# Altium PCB PCB1.PcbDoc
Units mm, origin at the board's own origin, x right, y up, seen from the top; angles counter-clockwise.
Board outline 50.25 x 80.25 mm, 2 copper layers (Top Layer, Bottom Layer); 28 components, 24 nets, 97 pads, 80 vias.
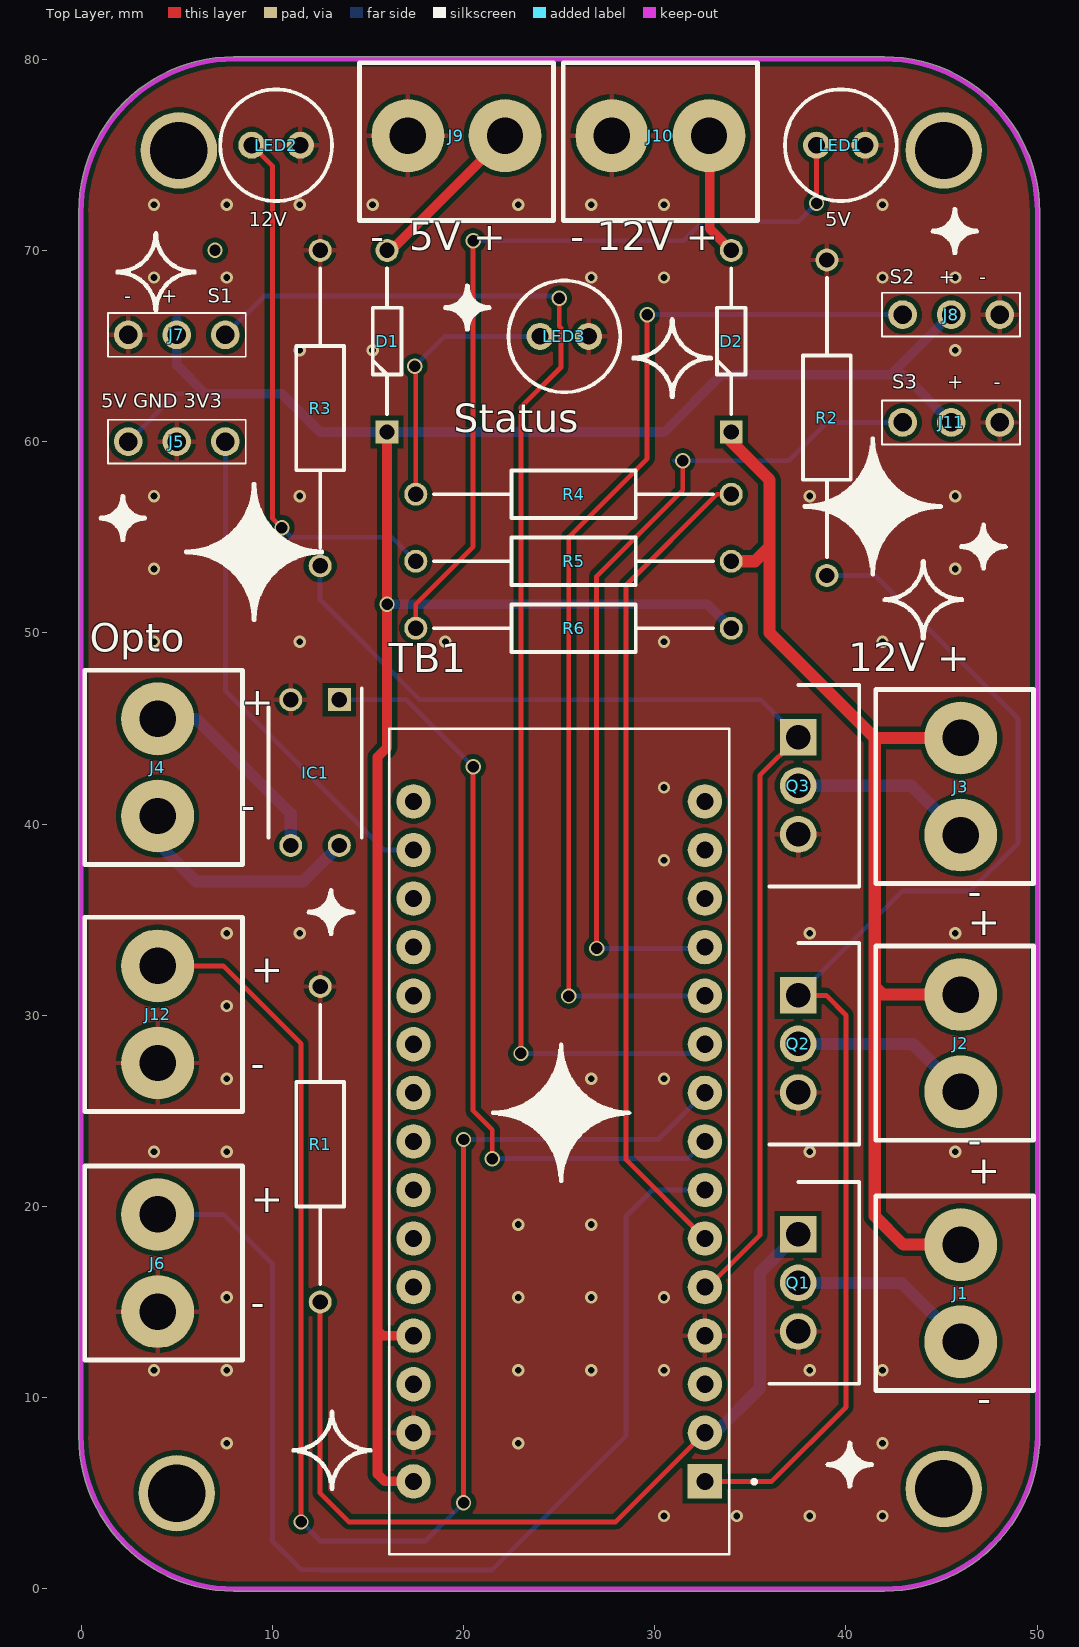
[diagram p0: Top Layer view]
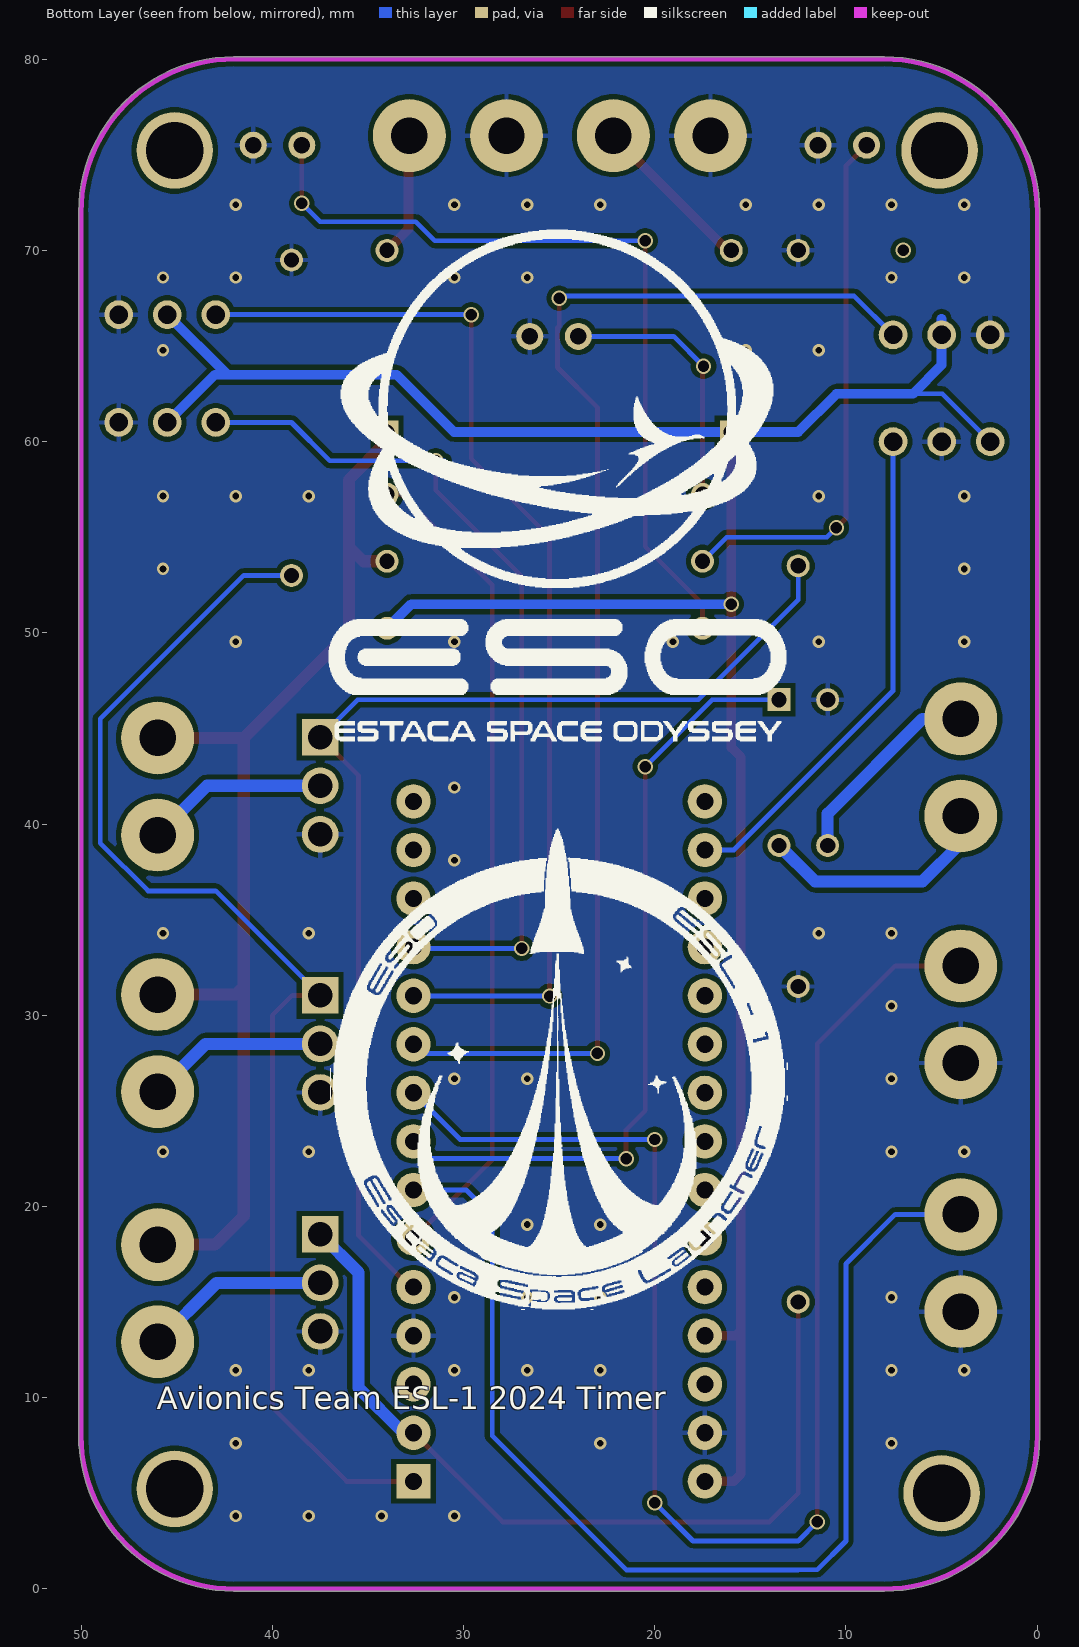
[diagram p1: Bottom Layer view, seen from below]
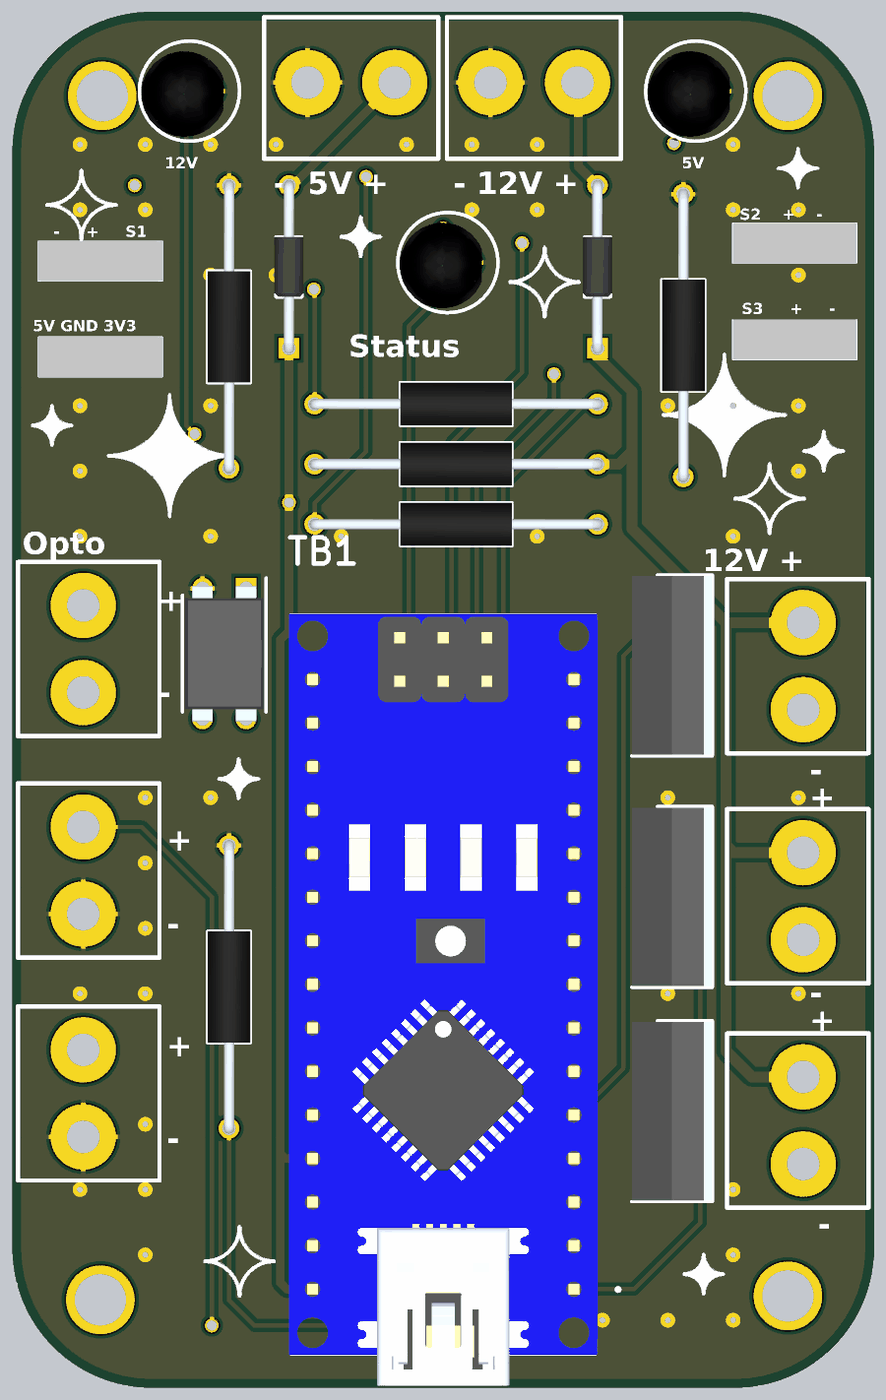
[diagram p2: 3D render of the assembled board from above, using the file's embedded part models]

## Layer stack, top to bottom
Top Solder: solder mask 0.0102, Solder Resist, Dk 3.5
Top Layer: signal copper 0.0356
Dielectric 1: dielectric 0.32, FR-4, Dk 4.8
Bottom Layer: signal copper 0.0356
Bottom Solder: solder mask 0.0102, Solder Resist, Dk 3.5

## Board outline
8,-0.127 cw(c8,8) -0.127,8 -0.127,72 cw(c8,72) 8,80.127 42,80.127 cw(c42,72) 50.127,72 50.127,7.5 50.107,7.432 cw(c42,8) 42,-0.127

## Design rules (kind name [scope] priority, off if disabled: settings)
Clearance [All] p1: gap=0.254 ignorepadtopadclearanceinfootprint=FALSE except(0: Arc-Hole Track-Hole SMDPad-Hole THPad-Hole Via-Hole Fill-Hole Poly-Hole Region-Hole Text-Hole)
PolygonConnect [All] p1: connectstyle=Relief reliefconductorwidth=0.254 reliefentries=4 polygonreliefangle="90 Angle" airgapwidth=0.254
RoutingVias [All] p1: holewidth=0.711 width=1.27 viastyle="Through Hole" minholewidth=0.5 minwidth=0.8 maxholewidth=0.6 maxwidth=0.9
SolderMaskExpansion [All] p1: expansion=0.102 istentingtop=FALSE
Width [All] p1: maxlimit=1.2 minlimit=0.254 preferedwidth=0.254 minimp=50.000000 maximp=50.000000 favimp=50.000000
30 further rules are at their usual default settings.

## Components (designator, comment, footprint, x,y, rotation, side; value= is the part's Value field where it differs from the comment)
D1 "SD103A-TR" DIOAD950W60L350D150 16,60.5 r90 top
D2 "SD103A-TR" DIOAD950W60L350D150 34,60.5 r90 top
IC1 "PC817X2NSZ0F" DIP762W60P254L458H400Q4N 12.23,42.69 r270 top
J1 "2 PIN" "Header 2_PIN" 46,12.92 r90 top
J2 "2 PIN" "Header 2_PIN" 46,26 r90 top
J3 "2 PIN" "Header 2_PIN" 46,39.42 r90 top
J4 "2 PIN" "Header 2_PIN" 4,45.5 r270 top
J5 "87224-3" 872243 2.46,60 r0 top
J6 "2 PIN" "Header 2_PIN" 4,19.58 r270 top
J7 "87224-3" 872243 2.46,65.58 r0 top
J8 "87224-3" 872243 48.04,66.64 r180 top
J9 "2 PIN" "Header 2_PIN" 22.167,76 r180 top
J10 "2 PIN" "Header 2_PIN" 32.836,76 r180 top
J11 "87224-3" 872243 48.04,61 r180 top
J12 "2 PIN" "Header 2_PIN" 4,32.58 r270 top
LED1 "HLMP-4740" HLMP4740 38.46,75.5 r90 top
LED2 "HLMP-4740" HLMP4740 8.923,75.5 r90 top
LED3 "HLMP-4740" HLMP4740 24,65.5 r90 top
Q1 "IRLZ44NPBF" TO254P469X1042X1967-3P 37.5,18.54 r270 top
Q2 "IRLZ44NPBF" TO254P469X1042X1967-3P 37.5,31.04 r270 top
Q3 "IRLZ44NPBF" TO254P469X1042X1967-3P 37.5,44.54 r270 top
R1 "MRS25000C1001FC100" RESAD1650W60L650D250 12.5,31.5 r270 top
R2 "MRS25000C1001FC100" RESAD1650W60L650D250 39,69.5 r270 top
R3 "MRS25000C1001FC100" RESAD1650W60L650D250 12.5,70 r270 top
R4 "MRS25000C1001FC100" RESAD1650W60L650D250 34,57.246 r180 top
R5 "MRS25000C1001FC100" RESAD1650W60L650D250 34,53.741 r180 top
R6 "MRS25000C1001FC100" RESAD1650W60L650D250 34,50.237 r180 top
TB1 "ARDUINO_NANO" SHIELD_ARDUINO_NANO 25,23.4 r180 top locked

## Footprints (in the part's own frame and the unit in brackets; to place one, negate y for a bottom-side part, rotate by r counter-clockwise, add the part's x,y. Pads: shape width x height; smd on the part's side, far side on the other; paste and mask are expansions set on the pad)
872243 [mil]
  round 59.09 hole 38: 1(0,0) 2(100,0) 3(200,0)
  silkscreen extent -42,-45 242,45, body extent -42,-46 242,46, height 409
DIOAD950W60L350D150 [mm]
  rect 1.2x1.2 hole 0.8: 1(0,0)
  round 1.2 hole 0.8: 2(9.5,0)
  silkscreen extent 0.95,-0.75 8.55,0.75, body extent -0.3,-0.85 9.8,0.85, height 1.69
DIP762W60P254L458H400Q4N [mm]
  rect 1.2x1.2 hole 0.8: 1(-3.81,1.27)
  round 1.2 hole 0.8: 2(-3.81,-1.27) 3(3.81,-1.27) 4(3.81,1.27)
  silkscreen extent -4.41,-2.44 3.4,2.44, body extent -3.96,-2.29 3.96,2.29, height 4
"Header 2_PIN" [mm] "200 mils"
  round 3.81 hole 1.905: 1(0,0) 2(5.08,0)
  silkscreen extent -2.54,-3.81 7.62,4.45, body extent -2.46,-3.56 7.54,4.44, height 10.03
HLMP4740 [mm]
  round 1.414 hole 0.87: 1(0,0) 2(0,-2.54)
  silkscreen extent -2.92,-4.19 2.92,1.65, body extent -2.99,-3.26 2.66,1.89, height 7.93
RESAD1650W60L650D250 [mm]
  round 1.2 hole 0.8: 1(0,0) 2(16.5,0)
  silkscreen extent 0.95,-1.25 15.55,1.25, body extent -0.3,-1.25 16.8,1.25, height 2.49
SHIELD_ARDUINO_NANO [mm]
  rect 1.8x1.8 / inner round 1.8 / far side rect 1.8x1.8 hole 0.9: 1(-7.62,17.78)
  round 1.8 hole 0.9: 2(-7.62,15.24) 3(-7.62,12.7) 4(-7.62,10.16) 5(-7.62,7.62) 6(-7.62,5.08) 7(-7.62,2.54) 8(-7.62,0) 9(-7.62,-2.54) 10(-7.62,-5.08) 11(-7.62,-7.62) 12(-7.62,-10.16) 13(-7.62,-12.7) 14(-7.62,-15.24) 15(-7.62,-17.78) 16(7.62,-17.78) 17(7.62,-15.24) 18(7.62,-12.7) 19(7.62,-10.16) 20(7.62,-7.62) 21(7.62,-5.08) 22(7.62,-2.54) 23(7.62,0) 24(7.62,2.54) 25(7.62,5.08) 26(7.62,7.62) 27(7.62,10.16) 28(7.62,12.7) 29(7.62,15.24) 30(7.62,17.78)
  silkscreen extent -10.3,-21.59 8.89,21.59, body extent -9,-21.6 9,23.4, height 12.6
TO254P469X1042X1967-3P [mm]
  rect 1.92x1.92 hole 1.28: 1(0,0)
  round 1.92 hole 1.28: 2(2.54,0) 3(5.08,0)
  silkscreen extent -2.73,-1.5 7.81,3.19, body extent -2.67,-1.5 7.75,3.19, height 18.84

## Part data
D1 D2: "Schottky Diode", Manufacturer_Name=Vishay, Mouser Part Number=625-SD103A, Arrow Part Number=SD103A-TR, Arrow Price/Stock=https://www.arrow.com/en/products/sd103a-tr/vishay?region=nac, Datasheet Link=https://componentsearchengine.com/Datasheets/5/SD103A-TR.pdf, Manufacturer_Part_Number=SD103A-TR, Mouser Price/Stock=https://www.mouser.co.uk/ProductDetail/Vishay-Semiconductors/SD103A-TR?qs=RwahMLkpD2urFD%2FzZdGOBw%3D%3D
IC1: "Integrated Circuit", Manufacturer_Name="Sharp Microelectronics", Mouser Part Number=N/A, Datasheet Link=https://datasheet.datasheetarchive.com/originals/distributors/Datasheets_SAMA/458e45842a103a05998fcebbd6f7366e.pdf, Height=4mm, Manufacturer_Part_Number=PC817X2NSZ0F, Mouser Price/Stock=https://www.mouser.co.uk/ProductDetail/Sharp-Microelectronics/PC817X2NSZ0F?qs=6kT3pPPHxnU7uYWM8Yy85A%3D%3D
J1 J2 J3 J4 J6 J9 J10 J12: library part Connector_2Pin
J5 J7 J8 J11: "Connector", Manufacturer_Name="TE Connectivity", Mouser Part Number=571-872243, Arrow Part Number=87224-3, Arrow Price/Stock=https://www.arrow.com/en/products/87224-3/te-connectivity?region=nac, Datasheet Link=https://datasheet.datasheetarchive.com/originals/distributors/Datasheets_SAMA/3b9b08c08f06dc562fe3ba32b60fa864.pdf, Height=10.3632mm, Manufacturer_Part_Number=87224-3, Mouser Price/Stock=https://www.mouser.co.uk/ProductDetail/TE-Connectivity/87224-3?qs=VKrXD49J9ErediZOfWku7Q%3D%3D
LED1 LED2 LED3: "LED", Manufacturer_Name="Avago Technologies", Mouser Part Number=630-HLMP-4740, Datasheet Link=https://docs.broadcom.com/docs/AV02-1557EN, Height=9.19mm, Manufacturer_Part_Number=HLMP-4740, Mouser Price/Stock=https://www.mouser.co.uk/ProductDetail/Broadcom-Avago/HLMP-4740?qs=jT9z6tsiFNlbkh2eYMYS%2Fw%3D%3D
Q1 Q2 Q3: "MOSFET (N-Channel)", Manufacturer_Name=Infineon, Mouser Part Number=942-IRLZ44NPBF, Arrow Part Number=IRLZ44NPBF, Arrow Price/Stock=https://www.arrow.com/en/products/irlz44npbf/infineon-technologies-ag?region=nac, Datasheet Link=http://www.irf.com/product-info/datasheets/data/irlz44n.pdf, Height=4.69mm, Manufacturer_Part_Number=IRLZ44NPBF, Mouser Price/Stock=https://www.mouser.co.uk/ProductDetail/Infineon-Technologies/IRLZ44NPBF?qs=9%252BKlkBgLFf15OZZk%252BD0ibg%3D%3D
R1 R2 R3 R4 R5 R6: "Resistor", Manufacturer_Name=Vishay, Mouser Part Number=594-MRS25000C1001FC1, Arrow Part Number=MRS25000C1001FC100, Arrow Price/Stock=https://www.arrow.com/en/products/mrs25000c1001fc100/vishay, Datasheet Link=http://www.vishay.com/docs/28724/mrs16m25.pdf, Manufacturer_Part_Number=MRS25000C1001FC100, Mouser Price/Stock=https://www.mouser.co.uk/ProductDetail/Vishay-BC-Components/MRS25000C1001FC100?qs=H30XFsNYD%2FEk7X0%2FV%252BraxQ%3D%3D
TB1: "Small, complete, and breadboard-friendly board based on the ATmega328 (Arduino Nano 3.x)", Package="Non-Standard Arduino", Availability="Not in stock", Check_prices=https://www.snapeda.com/parts/Arduino%20Nano/Arduino/view-part/?ref=eda, MF=Arduino, MP="Arduino Nano", Price=None, SnapEDA_Link=https://www.snapeda.com/parts/Arduino%20Nano/Arduino/view-part/?ref=snap

## Free pads (board coordinates)
  round 4 hole 3: 11(5,5) 11(5.108,75.226) 11(45.108,5.226) 11(45.108,75.226)

## Via types
v1: diameter 0.65, hole 0.35, Top Layer to Bottom Layer, 63 vias
v2: diameter 0.8, hole 0.6, Top Layer to Bottom Layer, 17 vias

## Nets (pads, with @x,y where several pads share a name; then routed paths per layer and width w, separated by ;. In a path a pad name is that pad's centre, name@x,y a point inside that pad or via, vN(x,y) a via of type N, cw(c..) or ccw(c..) an arc to the next point about the centre after c; other vN are vias at no path point)
3V3: J5.3 TB1.17 | length 26.3
  Bottom Layer w0.254: J5.3 7.54,46.96 15.86,38.64 TB1.17
5V: D1.1 J5.1 J7.2 J8.2 J11.2 R6.1 TB1.27 TB1.30 | length 133.4
  Top Layer w0.508: D1.1 v2(16,51.5) 16,44 15.5,43.5 15.5,13.5 ; TB1.30 15.88,5.62 15.5,6 15.5,13.5 ; TB1.27 15.76,13.24 15.5,13.5
  Bottom Layer w0.254: J5.1 4.96,62.5 6.5,62.5
  Bottom Layer w0.508: 5,66.421 5,64 6.5,62.5 10.5,62.5 12.5,60.5 D1.1 30.5,60.5 33.5,63.5 42.36,63.5 ; v2(16,51.5) 32.737,51.5 R6.1 ; J11.2 43,63.5 42.36,63.5 ; J8.2 42.36,63.5
5VIN: D1.2 J9.1 | length 8.7
  Top Layer w0.508: D1.2 16.207,70 J9.1@22.207,76
12V: D2.1 J1.2 J2.2 J3.2 R5.1 | length 60.7
  Top Layer w0.508: D2.1@34,60 D2.1
  Top Layer w0.635: R5.1 35.241,53.741 36,54.5 ; D2.1@34,60 36,58 36,54.5 ; J1.2 43,18 41.5,19.5 41.5,31.5 ; J2.2 41.92,31.08 41.5,31.5 ; J3.2 41.5,44.5 ; 36,54.5 36,50 41.5,44.5 ; 41.5,31.5 41.5,44.5
+12VIN: D2.2 J10.1 | length 6.5
  Top Layer w0.508: J10.1@32.876,76 32.876,71.124 D2.2
COLL: IC1.4 J4.2 | length 12.5
  Bottom Layer w0.635: J4.2 4,39 6,37 11.62,37 IC1.4
EMM: IC1.3 J4.1 | length 10.7
  Bottom Layer w0.635: J4.1 6,45.5 10.96,40.54 IC1.3
Fm1: J1.1 Q1.2 | length 9.8
  Bottom Layer w0.635: Q1.2 42.92,16 J1.1
Fm2: J2.1 Q2.2 | length 9.5
  Bottom Layer w0.635: Q2.2 43.5,28.5 J2.1
Fm3: J3.1 Q3.2 | length 9.6
  Bottom Layer w0.635: Q3.2 43.42,42 J3.1
GND: IC1.2 J5.2 J6.2 J7.1 J8.1 J9.2 J10.2 J11.1 J12.2 LED1.2 LED2.2 LED3.2 Q1.3 Q2.3 Q3.3 R1.1 R2.1 R3.1 TB1.4 TB1.29
  other v1: 30.48,3.81 34.29,3.81 38.1,3.81 41.91,3.81 7.62,7.62 22.86,7.62 41.91,7.62 3.81,11.43 7.62,11.43 22.86,11.43 26.67,11.43 30.48,11.43 38.1,11.43 41.91,11.43 7.62,15.24 22.86,15.24 26.67,15.24 30.48,15.24 22.86,19.05 26.67,19.05 3.81,22.86 7.62,22.86 38.1,22.86 45.72,22.86 7.62,26.67 26.67,26.67 30.48,26.67 7.62,30.48 7.62,34.29 11.43,34.29 38.1,34.29 45.72,34.29 30.48,38.1 30.48,41.91 3.81,49.53 11.43,49.53 19.05,49.53 30.48,49.53 41.91,49.53 3.81,53.34 45.72,53.34 3.81,57.15 11.43,57.15 38.1,57.15 41.91,57.15 45.72,57.15 11.43,64.77 15.24,64.77 45.72,64.77 3.81,68.58 7.62,68.58 26.67,68.58 30.48,68.58 41.91,68.58 45.72,68.58 3.81,72.39 7.62,72.39 11.43,72.39 15.24,72.39 22.86,72.39 26.67,72.39 30.48,72.39 41.91,72.39
IN: IC1.1 TB1.8 | length 40.9
  Top Layer w0.254: v2(20.5,43) 20.5,25 21.5,24 v2(21.5,22.5)
  Bottom Layer w0.254: IC1.1 17,46.5 v2(20.5,43) ; v2(21.5,22.5) 31.72,22.5 TB1.8
LED: R4.1 TB1.6 | length 43.4
  Top Layer w0.254: TB1.6 28.5,22.44 28.5,52.5 33.246,57.246 R4.1
MOS1: Q1.1 R1.2 TB1.2 | length 45.4
  Top Layer w0.254: R1.2 12.5,5 14,3.5 27.96,3.5 TB1.2
  Bottom Layer w0.635: TB1.2 33.16,8.16 35.5,10.5 35.5,16.54 Q1.1
MOS2: Q2.1 R2.2 TB1.1 | length 66.8
  Top Layer w0.254: TB1.1 36.12,5.62 40,9.5 40,30 38.96,31.04 Q2.1
  Bottom Layer w0.254: Q2.1 42.96,36.5 46.5,36.5 49,39 49,45.5 41.5,53 R2.2
MOS3: Q3.1 R3.2 TB1.5 | length 60.6
  Top Layer w0.254: TB1.5 32.78,15.78 35.5,18.5 35.5,42.54 Q3.1
  Bottom Layer w0.254: R3.2 12.5,51.718 17.718,46.5 35.54,46.5 Q3.1
NetLED1_1: LED1.1 R6.2 | length 43.3
  Top Layer w0.254: R6.2 17.5,51.5 20.5,54.5 v2(20.5,70.5) ; v2(38.46,72.46) LED1.1
  Bottom Layer w0.254: v2(20.5,70.5) 31.5,70.5 32.5,71.5 37.5,71.5 v2(38.46,72.46)
NetLED2_1: LED2.1 R5.2 | length 28.4
  Top Layer w0.254: LED2.1 10,74.423 10,56 v2(10.5,55.5)
  Bottom Layer w0.254: v2(10.5,55.5) 11,55 16.241,55 R5.2
NetLED3_1: LED3.1 R4.2 | length 13.9
  Top Layer w0.254: R4.2 v2@17.5,64
  Bottom Layer w0.254: v2(17.453,63.937) 19.015,65.5 LED3.1
OUT: J6.1 TB1.7 | length 59.8
  Bottom Layer w0.254: J6.1 7.42,19.58 10,17 10,2.5 11.5,1 12.5,1 12.508,0.992 21.492,0.992 28.5,8 28.5,19.5 29.86,20.86 TB1.7
PWM: J12.1 TB1.9 | length 76.7
  Top Layer w0.254: J12.1 7.42,32.58 11.5,28.5 v2(11.5,3.5) ; v2@19.953,23.595 v2@20.041,23.507 ; v2(20,4.5) v2(20,23.5)
  Bottom Layer w0.254: v2(11.5,3.5) 12.5,2.5 18,2.5 v2(20,4.5) ; v2(20,23.5) 30.18,23.5 TB1.9
"SERVO 1": J7.3 TB1.10 | length 68.6
  Top Layer w0.254: v2(23,28) 23,61.788 25.088,63.876 25.088,65.951 25,66.039 v2(25,67.5)
  Bottom Layer w0.254: J7.3 9.567,67.607 24.893,67.607 v2(25,67.5) ; v2(23,28) 32.126,28 32.133,27.993 TB1.10
"SERVO 2": J8.3 TB1.11 | length 58
  Top Layer w0.254: v2(25.5,31) 25.5,55 29.599,59.099 v2(29.599,66.633)
  Bottom Layer w0.254: v2(25.5,31) 32.586,31 32.593,30.993 TB1.11 ; v2@29.5,66.5 29.64,66.64 J8.3
"SERVO 3": J11.3 TB1.12 | length 45.8
  Top Layer w0.254: v2(26.959,33.493) 26.959,52.959 31.459,57.459 v2(31.459,58.993)
  Bottom Layer w0.254: v2(26.959,33.493) 32.553,33.493 TB1.12 ; 31,59 37,59 39,61 J11.3
pads on no net: TB1.3 TB1.13 TB1.14 TB1.15 TB1.16 TB1.18 TB1.19 TB1.20 TB1.21 TB1.22 TB1.23 TB1.24 TB1.25 TB1.26 TB1.28
copper on no net:
  other v2: 7,70

## Polygon pours and split planes (outlines as drawn)
GND on Top Layer "GND_L01_P000" (solid, remove dead copper, pour order 0): 8,-0.127 cw(c8,8) -0.127,8 -0.127,72 cw(c8,72) 8,80.127 42,80.127 cw(c42,72) 50.127,72 50.127,7.5 50.107,7.432 cw(c42,8) 42,-0.127
GND on Bottom Layer "GND_L02_P001" (solid, remove dead copper, pour order 1): 8,-0.127 cw(c8,8) -0.127,8 -0.127,72 cw(c8,72) 8,80.127 42,80.127 cw(c42,72) 50.127,72 50.127,7.5 50.107,7.432 cw(c42,8) 42,-0.127

## Keep-outs
Keep-Out Layer:
  lines w0.254: 0,13.5 0,72 cw(c8,72) 8,80 42,80 cw(c42,72) 50,72 50,7.5 ; 0,49 0,62 ; 0,52 0,8 ccw(c8,8) 8,0 32,0 ; 31.5,0 42,0 ccw(c42,8) 50,8

## Silkscreen, mask and mechanical layers (free items; w line width, h text height)
Top Overlay:
  drawing of 13 lines, arcs and shapes, not listed
  text "12V" at 8.758,71 h1.27
  text "5V" at 38.916,71 h1.27
  text "-  5V +" at 15.111,69.5 h2.54
  text "- 12V +" at 25.585,69.5 h2.54
  text "S2    +    -" at 42.284,68 h1.27
  text "-     +     S1" at 2.258,67 h1.27
  text "S3     +     -" at 42.412,62.5 h1.27
  text "5V GND 3V3" at 1.048,61.5 h1.27
  text "Status" at 19.479,60 h2.54
  text "Opto" at 0.444,48.5 h2.54
  text "12V +" at 40.113,47.5 h2.54
  text "+" at 8.369,45.19 h2.54
  text "-" at 8.369,39.774 h2.54
  text "-" at 46.369,35.274 h2.54
  text "+" at 46.369,33.69 h2.54
  text "+" at 8.869,31.19 h2.54
  text "-" at 8.869,26.274 h2.54
  text "-" at 46.369,22.274 h2.54
  text "+" at 46.369,20.69 h2.54
  text "+" at 8.869,19.19 h2.54
  text "-" at 8.869,13.774 h2.54
  text "-" at 46.869,8.774 h2.54
Bottom Overlay:
  drawing of 46 lines, arcs and shapes, not listed
  text "Avionics Team ESL-1 2024 Timer" at 46.038,9 h2.03